# Altium PCB remote.PcbDoc (part 2 of 4)
Units mil, origin at the board's own origin, x right, y up, seen from the top; angles counter-clockwise.
Board outline 1653.54 x 3582.68 mil, 2 copper layers (Top Layer, Bottom Layer); 71 components, 53 nets, 248 pads, 250 vias.
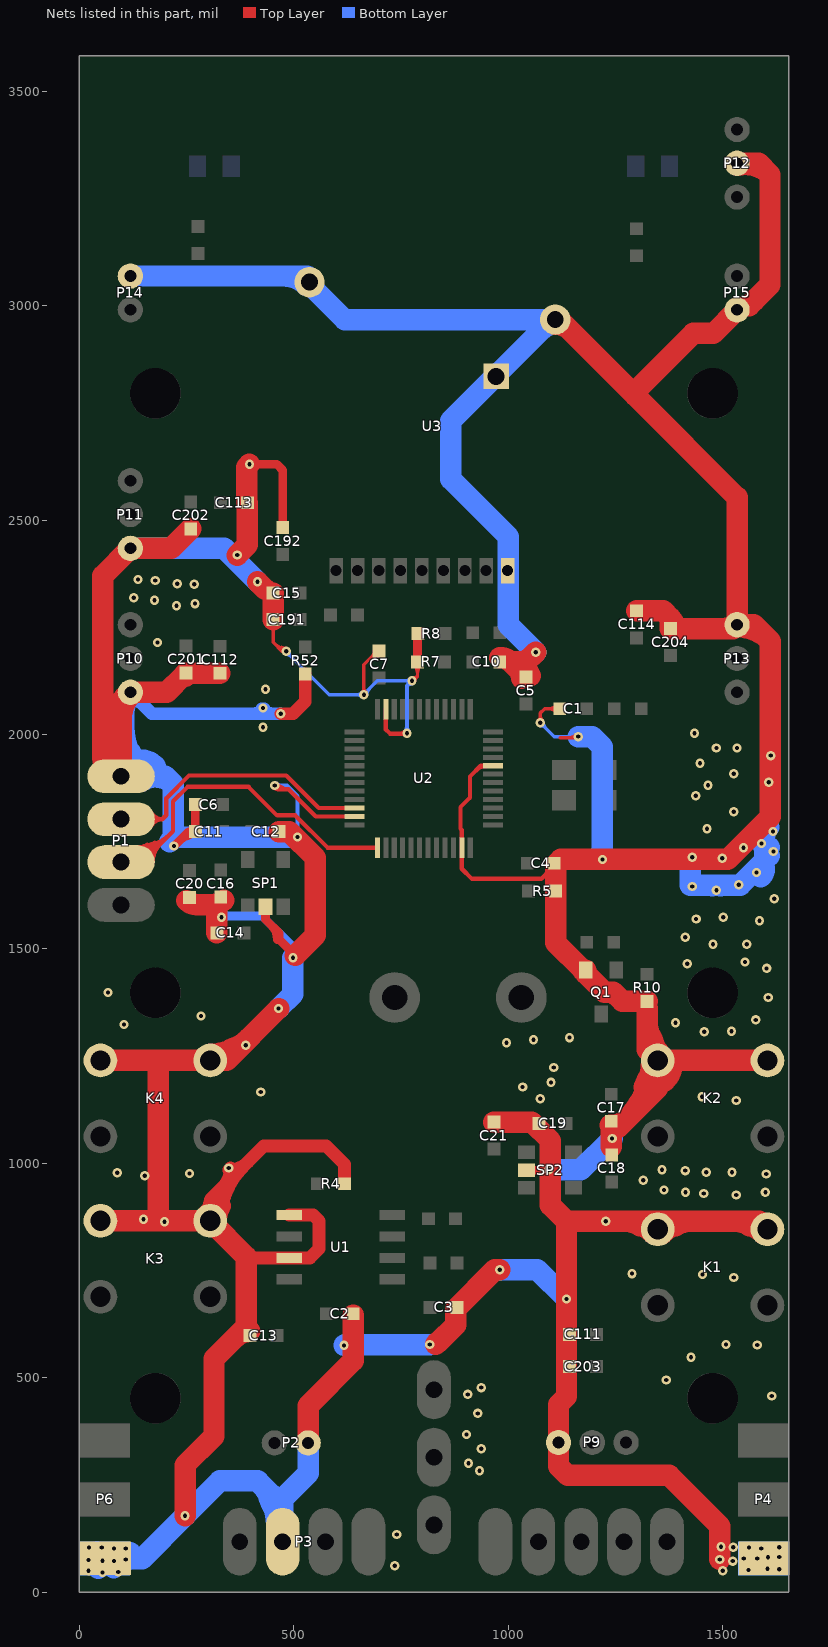
[diagram p2: the nets of this part, all layers, seen from the top]

## Via types
v1: diameter 21.65, hole 9.84, Top Layer to Bottom Layer, tented both sides, 241 vias
v2: diameter 21.65, hole 9.84, Top Layer to Bottom Layer, 9 vias

## Nets (pads, with @x,y where several pads share a name; then routed paths per layer and width w, separated by ;. In a path a pad name is that pad's centre, name@x,y a point inside that pad or via, vN(x,y) a via of type N, cw(c..) or ccw(c..) an arc to the next point about the centre after c; other vN are vias at no path point) (continued)
GND: C1.2 C2.2 C3.2 C4.1 C5.1 C6.1 C7.1 C10.2 C11.1 C12.2 C13.2 C14.2 C15.1 C16.2 C17.1 C18.2 C19.2 C20.2 C21.2 C111.1 C112.1 C113.1 C114.1 C191.2 C192.2 C201.2 C202.2 C203.2 C204.2 K1.2 K2.2 K3.2 K4.2 P1.1 P2.2 P3.2 P4.1 P6.1 P9.1 P10.1 P11.1 P12.2 P13.1 P14.2 P15.2 Q1.2 R4.1 R5.2 R7.1 R8.1 R10.2 R52.1 SP1.2 SP2.2 U1.1 U1.3 U2.8 U2.23 U2.35 U2.47 U3.8 U3.9 U3.10 | length 32683
  Top Layer w8: C191.2@451.77,2267.72 451.77,2214.57 472.44,2193.9 v1(482.28,2193.9) ; 471.35,2203.65 cw(c466.26,2184.64) v1@483.3,2194.48 ; v1(663.42,2092.62) 663.42,2162.43 695.87,2194.88 C7.1@698.82,2194.88 ; v1(775.63,2125.1) 777.66,2125.1 788.39,2135.83 ; R7.1@788.39,2169.29 788.39,2135.83 ; v1(1074.8,2027.56) 1074.8,2050.2 1084.64,2060.04 C1.2@1120.08,2060.04 ; 1121.06,1992.13 1160.43,1992.13 v1(1163.39,1995.08) ; 451.77,2241.16 cw(c478.33,2241.16) 459.55,2259.94 ccw(c478.33,2241.16) 451.77,2241.16 ; 451.77,2241.16 ccw(c425.22,2241.16) 443.99,2259.94 cw(c425.22,2241.16) 451.77,2241.16 ; 663.42,2109.1 cw(c646.94,2109.1) 658.59,2097.45 ccw(c646.94,2109.1) 663.42,2109.1 ; 663.42,2109.1 ccw(c679.9,2109.1) 668.25,2097.45 cw(c679.9,2109.1) 663.42,2109.1 ; 788.39,2135.83 cw(c778.5,2145.71) 776.57,2131.87 ccw(c778.5,2145.71) 788.39,2135.83 ; 788.39,2142.74 cw(c814.94,2142.74) 796.16,2161.51 ccw(c814.94,2142.74) 788.39,2142.74 ; 788.39,2142.73 ccw(c761.83,2142.73) 780.61,2161.51 cw(c761.83,2142.73) 788.39,2142.73 ; 1074.8,2044.04 cw(c1058.32,2044.04) 1069.98,2032.39 ccw(c1058.32,2044.04) 1074.8,2044.04 ; 1074.8,2044.04 ccw(c1091.28,2044.04) 1079.63,2032.39 cw(c1091.28,2044.04) 1074.8,2044.04 ; 1093.52,2060.04 cw(c1093.52,2033.49) 1112.3,2052.26 ccw(c1093.52,2033.49) 1093.52,2060.04 ; 1093.52,2060.04 ccw(c1093.52,2086.6) 1112.3,2067.82 cw(c1093.52,2086.6) 1093.52,2060.04 ; 453.83,2212.51 ccw(c482.28,2240.97) 482.28,2200.72 cw(c482.28,2240.97) 453.83,2212.51 ; 467.48,2198.85 ccw(c482.28,2213.65) 482.28,2192.72 cw(c482.28,2213.65) 467.48,2198.85 ; 675,2174.02 cw(c698.82,2150.2) 698.82,2183.88 ccw(c698.82,2150.2) 675,2174.02 ; 682.13,2181.14 ccw(c668.39,2194.88) 687.82,2194.88 cw(c668.39,2194.88) 682.13,2181.14 ; v1@782.46,2125.1 cw(c794.02,2125.1) 785.84,2133.28 ccw(c794.02,2125.1) v1@782.46,2125.1 ; 1139.78,1992.13 ccw(c1139.78,2018.69) 1158.56,1999.91 cw(c1139.78,2018.69) 1139.78,1992.13
  Top Layer w10: v1@458.6,1875.85 cw(c466,1862.92) 474.25,1875.32 ; 462.6,1872.05 488.19,1872.05 ; U2.35@641.73,1809.06 551.18,1809.06 488.19,1872.05 ; U2.23@714.57,2059.05 714.57,2011.81 724.41,2001.97 762.8,2001.97 v1(763.78,2002.95) ; U2.8@964.57,1927.17 936.02,1927.17 910.93,1902.07 910.93,1852.85 888.78,1830.71 888.78,1780.51 891.73,1777.56 891.73,1687.01 915.35,1663.39 1076.77,1663.39 C4.1@1110.24,1696.85 ; 1092.97,1683.7 cw(c1116.17,1677.49) C4.1@1107.28,1699.8 ; 488.19,1872.05 cw(c488.19,1909.48) 460.08,1884.75 ccw(c488.19,1909.48) 488.19,1872.05 ; v1@452.58,1878.15 ccw(c466.07,1890.02) 466.07,1872.05 cw(c466.07,1890.02) v1@452.58,1878.15 ; 747.34,2001.97 ccw(c747.34,2019.4) 759.66,2007.07 cw(c747.34,2019.4) 747.34,2001.97 ; 752.09,2001.97 cw(c752.09,1991.26) 759.66,1998.83 ccw(c752.09,1991.26) 752.09,2001.97 ; 926.82,1917.96 cw(c946.85,1897.94) 946.85,1926.26 ccw(c946.85,1897.94) 926.82,1917.96 ; 1086.04,1672.66 ccw(c1058.89,1699.8) 1097.28,1699.8 cw(c1058.89,1699.8) 1086.04,1672.66
  Top Layer w20: v1@220.96,1739.67 254.92,1773.62 C11.1@270.67,1773.62 C6.1@270.67,1836.61 ; 249,1762.81 ccw(c241.61,1790.4) C11.1@266.34,1776.12 ; v1(396.65,2629.92) 460.63,2629.92 474.41,2616.14 C192.2@474.41,2482.28 ; SP1.2@434.06,1598.43 434.06,1568.9 466.53,1536.42 466.53,1521.65 v1@498.03,1490.16 ; 447.56,1555.39 cw(c413.82,1521.65) 461.53,1521.65 ; R7.1@788.39,2169.29 788.39,2234.25 R8.1@789.37,2235.24 ; SP2.2@1042.32,984.25 v1@1093.5,984.25 ; 1240.16,1039.37 1240.16,1020.67 C18.2@1241.14,1019.68 ; 235.25,1753.95 cw(c270.67,1718.53) 270.67,1768.62 ccw(c270.67,1718.53) 235.25,1753.95 ; 488.97,1499.22 cw(c469.07,1479.33) 497.2,1479.33 ccw(c469.07,1479.33) 488.97,1499.22
  Top Layer w30: K3.2@293.66,887.65 ccw(c277.08,918.78) 311.15,909.65 ccw(c332.78,903.85) K3.2@319.53,885.79 ; K3.2@305.12,866.14 305.12,915.35 ; K3.2@307.93,861.27 ccw(c274.54,919.1) 339.05,901.81 ; 388.78,779.92 537.79,779.92 559.06,801.18 559.06,866.14 545.28,879.92 U1.1@489.17,879.92 ; v1(469.49,2048.23) 498.03,2048.23 526.57,2076.77 R52.1@526.57,2140.75 ; R4.1@618.11,952.76 618.11,998.03 575.79,1040.35 430.12,1040.35 305.12,915.35 ; 305.12,915.35 cw(c267.62,915.35) 290.35,885.53 ccw(c267.62,915.35) 305.12,915.35 ; 305.12,915.35 ccw(c342.62,915.35) 319.89,885.52 cw(c342.62,915.35) 305.12,915.35 ; K3.2@299.49,866.14 cw(c404.71,866.14) 330.31,940.54 ccw(c404.71,866.14) K3.2@299.49,866.14 ; K3.2@329.49,866.14 cw(c507.13,866.14) 381.52,991.76 ccw(c507.13,866.14) K3.2@329.49,866.14 ; 333.97,944.21 ccw(c289.01,989.17) 352.6,989.17 cw(c289.01,989.17) 333.97,944.21 ; v1@348.43,985 ccw(c348.43,1048.59) 393.39,1003.62 cw(c348.43,1048.59) v1@348.43,985
  Top Layer w50: K3.2@49.21,866.14 K3.2@305.12,866.14 388.78,782.48 388.78,779.92 388.78,619.09 313.98,544.29 313.98,364.17 246.56,296.75 v1(246.56,178.64) ; K4.2@49.21,1240.16 184.06,1240.16 ; 184.06,867.13 184.06,1240.16 ; C201.2@247.54,2135.33 249.02,2136.81 C201.2@249.02,2143.7 244.09,2138.78 203.74,2098.43 P10.1@119.09,2098.43 97.44,2076.78 P1.1@97.44,1902.56 55.12,1944.88 55.12,2370.08 P11.1@119.09,2434.06 214.57,2434.06 C202.2@259.84,2479.33 ; C201.2@250,2142.72 C112.1@327.76,2142.72 ; 276.57,1603.35 320.87,1603.35 C14.2@320.87,1537.4 ; K4.2@317.56,1232.97 cw(c388.65,1191.93) 367.4,1271.22 ; v1(368.11,2418.31) 391.73,2441.93 C113.1@391.73,2540.35 390.26,2541.83 390.26,2623.53 v1(396.65,2629.92) ; v1(415.35,2356.3) 433.07,2338.58 ; C191.2@451.77,2267.72 C15.1@451.77,2329.72 ; v1(464.57,1361.22) 343.5,1240.16 184.06,1240.16 ; C12.2@465.55,1773.62 489.71,1773.62 550.2,1713.13 550.2,1531.5 v1@503.44,1484.74 ; P2.2@533.46,348.43 533.46,435.04 638.78,540.35 C2.2@638.78,646.65 ; 830.71,578.74 833.74,581.78 835.73,581.78 877.32,623.37 877.32,660.78 968.5,751.97 v1(980.32,751.97) ; C21.2@966.54,1096.46 1055.12,1096.46 1098.32,1053.25 1098.32,902.66 1135.83,865.16 ; C5.1@1041.34,2133.86 1005.91,2169.29 ; v1(1063.98,2191.93) 1041.34,2169.29 ; U3.10@1111.14,2975 1291.1,2795.04 1431.1,2935.04 1478.35,2935.04 P15.2@1533.46,2990.16 ; 1240.16,1039.37 1240.16,1085.63 1252.95,1085.63 1255.41,1083.17 1348.43,1176.18 K2.2@1348.43,1240.16 K2.2@1604.33,1240.16 ; 1296.02,2790.12 1533.46,2552.68 P13.1@1533.46,2255.91 ; C114.1@1299.21,2288.39 1361.22,2288.39 1377.95,2271.65 ; 1301.03,857.79 ccw(c1320.22,891.03) K1.2@1340.74,858.6 ; 1317.37,1177.87 cw(c1396.65,1156.63) K2.2@1355.61,1227.71 ; K2.2@1323.82,1264.76 1323.82,1362.2 ; R10.2@1323.82,1377.95 1266.28,1377.95 1245.13,1399.11 1224.37,1399.11 1181.1,1442.38 Q1.2@1181.1,1450.79 1174.19,1450.79 1110.24,1514.74 1110.24,1696.85 1122.05,1708.66 v1(1219.49,1708.66) 1511.81,1708.66 1611.22,1808.07 1611.22,2217.52 1572.83,2255.91 P13.1@1533.46,2255.91 ; 1331.87,1296.59 cw(c1282.03,1267.81) K2.2@1335.16,1245.68 ; K1.2@1356.11,858.6 ccw(c1376.63,891.03) 1395.82,857.79 ; v1(1493.11,76.77) 1493.11,154.53 1375,272.64 1138.78,272.64 1117.13,294.29 1117.13,437.99 1135.83,456.69 v1(1135.83,684.05) 1135.83,865.16 ; P12.2@1533.46,3331.69 1583.66,3331.69 1610.24,3305.12 ; 1556.94,857.79 ccw(c1576.12,891.03) K1.2@1596.65,858.6 ; 1562.01,3000 1610.24,3048.23 1610.24,3305.12 ; P4.1@1566.93,89.57 P4.1@1582.68,89.57 ; K1.2@1604.33,846.46 1585.63,865.16 1135.83,865.16 ; 55.12,1944.38 ccw(c99.89,1944.38) P1.1@68.23,1912.72 ; 55.12,1944.38 ccw(c99.89,1944.38) P1.1@68.23,1912.72 ; 55.12,1944.38 ccw(c99.89,1944.38) P1.1@68.23,1912.72 ; 55.12,1944.38 ccw(c99.89,1944.38) P1.1@68.23,1912.72 ; C20.2@249.82,1613.01 ccw(c273.14,1636.33) 273.14,1603.35 ; C20.2@249.82,1613.01 ccw(c273.14,1636.33) 273.14,1603.35 ; C20.2@249.82,1613.01 ccw(c273.14,1636.33) 273.14,1603.35 ; C20.2@249.82,1613.01 ccw(c273.14,1636.33) 273.14,1603.35 ; 1005.91,2169.29 ccw(c981.67,2145.06) 979.76,2179.28 cw(c981.67,2145.06) 1005.91,2169.29 ; 1005.91,2169.29 cw(c1005.91,2121.89) 1050.81,2137.06 ccw(c1005.91,2121.89) 1005.91,2169.29 ; 1005.91,2169.29 1041.34,2169.29 ; 1041.34,2169.29 ccw(c1068.47,2142.16) 1031.78,2130.93 cw(c1068.47,2142.16) 1041.34,2169.29 ; 1377.95,2271.65 cw(c1353.8,2247.5) 1387.95,2246.86 ccw(c1353.8,2247.5) 1377.95,2271.65 ; 1377.95,2271.65 C204.2@1377.95,2247.05 1524.61,2247.05 P13.1@1533.46,2255.91 ; 1610.23,3305.12 ccw(c1552.11,3247) 1534.44,3327.27 cw(c1552.11,3247) 1610.23,3305.12 ; 97.44,2035.23 cw(c182.29,2035.23) 122.29,2095.22 ccw(c182.29,2035.23) 97.44,2035.23 ; 97.44,2067.81 cw(c123.91,2067.81) 119.79,2093.95 ccw(c123.91,2067.81) 97.44,2067.81 ; K4.2@305.12,1254.53 ccw(c305.12,1381.89) 395.18,1291.83 cw(c305.12,1381.89) K4.2@305.12,1254.53 ; 311.09,1603.35 ccw(c311.09,1639.69) 336.8,1613.99 cw(c311.09,1639.69) 311.09,1603.35 ; 364.3,594.62 cw(c397.64,561.28) 397.64,608.43 ccw(c397.64,561.28) 364.3,594.62 ; C10.2@980.31,2179.29 cw(c980.31,2141.65) 1006.93,2168.27 ccw(c980.31,2141.65) C10.2@980.31,2179.29 ; C5.1@1031.34,2133.86 cw(c1092.74,2133.86) 1049.32,2177.28 ccw(c1092.74,2133.86) C5.1@1031.34,2133.86 ; U3.10@1109.57,2956.89 cw(c1109.57,2909.36) 1143.17,2942.97 ccw(c1109.57,2909.36) U3.10@1109.57,2956.89 ; C17.1@1238.18,1088.62 ccw(c1245.29,1123.81) 1270.67,1098.43 cw(c1245.29,1123.81) C17.1@1238.18,1088.62 ; C17.1@1240.16,1088.43 ccw(c1240.16,1137.95) 1275.17,1102.93 cw(c1240.16,1137.95) C17.1@1240.16,1088.43 ; 1268.58,865.16 cw(c1268.58,766.62) 1338.26,836.3 ccw(c1268.58,766.62) 1268.58,865.16 ; 1278.66,1106.41 ccw(c1144.91,1240.16) 1334.06,1240.16 cw(c1144.91,1240.16) 1278.66,1106.41 ; 1323.82,1334.25 ccw(c1442.52,1334.25) 1358.59,1250.32 cw(c1442.52,1334.25) 1323.82,1334.25 ; K1.2@1358.59,836.3 cw(c1428.27,766.62) 1428.27,865.16 ccw(c1428.27,766.62) K1.2@1358.59,836.3 ; 1364.01,1191.77 ccw(c1315.62,1240.16) 1384.06,1240.16 cw(c1315.62,1240.16) 1364.01,1191.77 ; 1377.62,2271.98 cw(c1352.69,2247.05) 1387.95,2247.05 ccw(c1352.69,2247.05) 1377.62,2271.98 ; 1501.15,2247.05 ccw(c1501.15,2288.22) 1530.26,2259.11 cw(c1501.15,2288.22) 1501.15,2247.05 ; 1524.49,865.16 cw(c1524.49,766.62) 1594.17,836.3 ccw(c1524.49,766.62) 1524.49,865.16 ; P13.1@1533.46,2251.38 cw(c1533.46,2145.4) 1608.4,2220.34 ccw(c1533.46,2145.4) P13.1@1533.46,2251.38 ; P15.2@1533.46,2994.69 ccw(c1533.46,3050.76) 1573.12,3011.11 cw(c1533.46,3050.76) P15.2@1533.46,2994.69
  Bottom Layer w8: P6.1@17.69,70.23 cw(c13.44,64.28) P6.1@20.5,62.38 ; P6.1@18.24,69.88 cw(c14.02,62.57) P6.1@22.17,64.75 ; P6.1@21.14,64.76 cw(c29.28,62.57) P6.1@25.07,69.88 ; P6.1@22.81,62.38 cw(c29.87,64.28) P6.1@25.62,70.23 ; P6.1@39.19,47.28 ccw(c42.5,53.01) P6.1@48.23,49.69 ; P6.1@56.8,99.32 cw(c64.85,90.64) P6.1@67.91,102.07 ; P6.1@58.08,107.74 ccw(c66.76,112.75) P6.1@64.16,103.07 ; P6.1@59.06,78.74 48.23,78.74 v1(22.64,104.33) v1(52.17,104.33) 78.74,104.33 v1(80.71,102.36) v1(108.27,102.36) v1(108.27,76.77) 104.33,72.83 v1(80.71,72.83) 55.12,72.83 v1(54.13,73.82) 23.62,73.82 v1(21.65,75.79) v1(21.65,50.2) 50.19,50.2 v1(54.13,46.26) 89.57,46.26 v1(90.55,47.24) ; P6.1@66.41,74.6 ccw(c68.77,83.4) P6.1@75.6,77.36 ; P6.1@68.93,73.92 cw(c66.43,64.59) P6.1@74.8,69.42 ; P6.1@84.41,78.57 ccw(c92.64,91.31) P6.1@96.56,76.66 ; P6.1@86.62,69.42 cw(c99.69,61.88) P6.1@95.78,76.45 ; P6.1@93.32,75.76 cw(c96.63,70.02) P6.1@102.36,73.35 ; P6.1@104.3,96.81 cw(c100.05,90.85) P6.1@107.12,88.96 ; P6.1@104.85,96.45 cw(c100.64,89.15) P6.1@108.78,91.33 ; P6.1@107.75,91.33 cw(c115.9,89.15) P6.1@111.68,96.45 ; P6.1@109.42,88.96 cw(c116.49,90.85) P6.1@112.23,96.81 ; v1(482.28,2193.9) 481.3,2193.9 582.58,2092.62 v1(663.42,2092.62) 663.42,2093.54 694.99,2125.1 v1(775.63,2125.1) ; v1(1074.8,2027.56) 1107.28,1995.08 v1(1163.39,1995.08) ; P4.1@1547.76,85.41 ccw(c1544.7,99.5) 1557.19,92.29 ccw(c1570.15,84.8) P4.1@1555.77,80.64 ; P4.1@1554.76,88.08 ccw(c1548.22,94.62) P4.1@1555.58,100.21 ; P4.1@1555.38,91.02 cw(c1574.49,92.4) P4.1@1560.15,105.11 ; P4.1@1558.27,58.76 ccw(c1552.44,80.52) P4.1@1571.95,69.26 ; v1(1560.04,52.17) 1580.71,72.83 v1(1580.71,78.74) v1(1549.21,78.74) ; P4.1@1566.63,53.93 cw(c1576.71,56.63) P4.1@1567.68,61.85 ; P4.1@1568.54,65.84 ccw(c1555.65,78.74) P4.1@1573.88,78.74 ; P4.1@1570.3,67.6 cw(c1580.71,57.19) P4.1@1580.71,71.91 ; P4.1@1571.3,69.09 cw(c1587.36,64.79) P4.1@1580.2,79.8 ; P4.1@1579.69,79.33 cw(c1596.74,69.49) P4.1@1591.64,88.5 ; P4.1@1585.63,83.47 ccw(c1591.81,89.42) 1594.03,81.14 ccw(c1597.13,69.55) P4.1@1586.67,75.41 ; P4.1@1586.34,82.61 ccw(c1590.79,85.66) 1592.18,80.45 ccw(c1594.25,72.73) P4.1@1586.95,75.97 ; P4.1@1587.8,95.77 cw(c1584.49,83.42) P4.1@1595.56,89.81 ; P4.1@1590.01,103.45 cw(c1584.71,90.58) P4.1@1598.15,94.18 ; P4.1@1590.95,96.64 cw(c1583.35,83.46) P4.1@1598.51,82.24 ; P4.1@1591.43,80.25 cw(c1594.39,75.12) P4.1@1599.47,78.17 ; P4.1@1592.81,93.7 ccw(c1605.32,106.21) P4.1@1605.32,88.52 ; P4.1@1594.01,92.49 cw(c1583.21,81.69) P4.1@1598.49,81.69 ; P4.1@1594.49,78.74 P4.1@1621.06,105.31 ; P4.1@1595.48,98.95 ccw(c1601.14,95.69) P4.1@1596.52,91.07 ; P4.1@1596.03,90.86 ccw(c1611.07,94.89) P4.1@1604.85,80.62 ; P4.1@1596.08,100.33 ccw(c1613.01,95.05) P4.1@1597.65,86.19 ; P4.1@1596.36,101.69 ccw(c1611.07,100.22) P4.1@1603.68,87.42 ; P4.1@1597.23,97.61 cw(c1582.1,88.88) P4.1@1598.79,83.71 ; P4.1@1597.48,89.34 ccw(c1610.42,92.81) P4.1@1604.83,80.63 ; P4.1@1599.07,94.44 ccw(c1610.5,101.03) P4.1@1607.08,88.29 ; P4.1@1600.11,93.4 cw(c1609.07,102.36) P4.1@1596.39,102.36 ; P4.1@1600.24,77.13 cw(c1591.41,69.21) P4.1@1602.87,66.14 ; P4.1@1603.69,69.22 cw(c1614.13,66.42) P4.1@1608.73,75.78 ; P4.1@1603.9,89.61 ccw(c1589.58,75.29) P4.1@1589.57,95.54 ; P4.1@1604.18,81.39 cw(c1617.11,84.81) P4.1@1609.6,95.87 ; P4.1@1604.94,69.32 cw(c1609.9,70.65) P4.1@1607.93,75.39 ; P4.1@1605.95,80.71 ccw(c1595.23,97.21) P4.1@1614.49,93.12 ; P4.1@1611.92,83.44 cw(c1628.69,87.86) P4.1@1618.94,102.21 ; P4.1@1617.07,55.77 ccw(c1619.6,65.22) P4.1@1626.89,58.69 ; P4.1@1617.53,92.51 cw(c1631.97,78.08) P4.1@1631.97,98.49 ; P4.1@1620.77,54.78 cw(c1618.51,46.37) P4.1@1626.06,50.72 ; P4.1@1621.04,95.56 ccw(c1615.94,114.57) P4.1@1632.99,104.73 ; P4.1@1621.47,96.45 ccw(c1612.6,105.32) P4.1@1625.14,105.32 ; P4.1@1628.19,99.63 cw(c1625.13,95.02) 1630.48,93.59 cw(c1639.08,91.28) P4.1@1635.06,99.23 ; P4.1@1628.88,99.23 cw(c1624.86,91.28) 1633.46,93.59 cw(c1638.81,95.02) P4.1@1635.75,99.63 ; P6.1@17.69,55.75 ccw(c13.43,61.71) P6.1@20.5,63.6 ; P6.1@17.69,55.75 ccw(c13.43,61.71) P6.1@20.5,63.6 ; P6.1@17.69,55.75 ccw(c13.43,61.71) P6.1@20.5,63.6 ; P6.1@18.24,56.11 ccw(c14.03,63.41) P6.1@22.17,61.23 ; P6.1@18.24,56.11 ccw(c14.03,63.41) P6.1@22.17,61.23 ; P6.1@18.24,56.11 ccw(c14.03,63.41) P6.1@22.17,61.23 ; P6.1@21.14,61.23 ccw(c29.29,63.42) P6.1@25.07,56.11 ; P6.1@21.14,61.23 ccw(c29.29,63.42) P6.1@25.07,56.11 ; P6.1@21.14,61.23 ccw(c29.29,63.42) P6.1@25.07,56.11 ; P6.1@21.65,59.31 cw(c38.13,59.31) P6.1@26.48,70.96 ; P6.1@21.65,59.31 ccw(c5.17,59.31) 16.83,70.96 cw(c5.17,59.31) P6.1@21.65,59.31 ; P6.1@21.65,59.31 cw(c38.13,59.31) P6.1@26.48,70.96 ; P6.1@21.65,66.68 cw(c5.18,66.68) 16.83,55.03 ccw(c5.18,66.68) P6.1@21.65,66.68 ; P6.1@21.65,66.68 ccw(c38.14,66.68) P6.1@26.48,55.03 ; P6.1@21.65,66.68 ccw(c38.14,66.68) P6.1@26.48,55.03 ; P6.1@22.8,63.6 ccw(c29.87,61.71) P6.1@25.62,55.76 ; P6.1@22.8,63.6 ccw(c29.87,61.71) P6.1@25.62,55.76 ; P6.1@22.8,63.6 ccw(c29.87,61.71) P6.1@25.62,55.76 ; P6.1@25.43,44.51 cw(c35.56,29.25) P6.1@40.3,46.94 ; P6.1@25.43,44.51 cw(c35.56,29.25) P6.1@40.3,46.94 ; P6.1@25.43,44.51 cw(c35.56,29.25) P6.1@40.3,46.94 ; P6.1@26.48,55.03 ccw(c38.14,66.68) P6.1@38.14,50.2 ; P6.1@26.48,55.03 ccw(c38.14,66.68) P6.1@38.14,50.2 ; P6.1@26.48,70.96 cw(c33.38,64.06) 33.38,73.82 ccw(c33.38,64.06) P6.1@26.48,70.96 ; P6.1@27.57,53.61 ccw(c36.88,58.99) P6.1@34.09,48.6 ; P6.1@27.57,53.61 ccw(c36.88,58.99) P6.1@34.09,48.6 ; P6.1@27.57,53.61 ccw(c36.88,58.99) P6.1@34.09,48.6 ; P6.1@34.29,92.68 cw(c45.95,104.33) 29.46,104.33 ccw(c45.95,104.33) P6.1@34.29,92.68 ; P6.1@34.29,92.68 ccw(c22.64,81.02) 22.64,97.5 cw(c22.64,81.02) P6.1@34.29,92.68 ; P6.1@35.68,104.33 cw(c35.68,87.85) 47.34,99.5 ccw(c35.68,87.85) P6.1@35.68,104.33 ; P6.1@35.68,104.33 ccw(c35.68,120.81) 47.34,109.16 cw(c35.68,120.81) P6.1@35.68,104.33 ; P6.1@37.65,73.82 cw(c37.65,57.34) 49.31,68.99 ccw(c37.65,57.34) P6.1@37.65,73.82 ; P6.1@37.65,73.82 ccw(c37.65,90.3) 49.31,78.65 cw(c37.65,90.3) P6.1@37.65,73.82 ; P6.1@38.14,50.2 ccw(c38.14,33.72) 26.48,45.37 cw(c38.14,33.72) P6.1@38.14,50.2 ; P6.1@39.12,104.33 cw(c39.12,120.81) 27.47,109.16 ccw(c39.12,120.81) P6.1@39.12,104.33 ; P6.1@39.12,104.33 ccw(c39.12,87.85) 27.47,99.5 cw(c39.12,87.85) P6.1@39.12,104.33 ; P6.1@58.7,68.74 cw(c66.62,59.92) P6.1@69.69,71.37 ; P6.1@58.7,68.74 cw(c66.62,59.92) P6.1@69.69,71.37 ; P6.1@58.7,68.74 cw(c66.62,59.92) P6.1@69.69,71.37 ; P6.1@60.05,77.23 ccw(c69.41,82.64) P6.1@66.61,72.2 ; P6.1@60.05,77.23 ccw(c69.41,82.64) P6.1@66.61,72.2 ; P6.1@60.05,77.23 ccw(c69.41,82.64) P6.1@66.61,72.2 ; P6.1@60.44,76.43 ccw(c65.18,78.4) P6.1@66.51,73.45 ; P6.1@60.44,76.43 ccw(c65.18,78.4) P6.1@66.51,73.45 ; P6.1@60.44,76.43 ccw(c65.18,78.4) P6.1@66.51,73.45 ; P6.1@64.23,72.83 cw(c64.23,56.35) 75.88,68.01 ccw(c64.23,56.35) P6.1@64.23,72.83 ; P6.1@64.23,72.83 ccw(c64.23,89.32) 75.88,77.66 cw(c64.23,89.32) P6.1@64.23,72.83 ; P6.1@68.65,104.33 cw(c68.65,120.81) 56.99,109.16 ccw(c68.65,120.81) P6.1@68.65,104.33 ; P6.1@68.65,104.33 ccw(c68.65,87.85) 56.99,99.5 cw(c68.65,87.85) P6.1@68.65,104.33 ; P6.1@70.62,46.26 cw(c70.62,62.74) 58.96,51.09 ccw(c70.62,62.74) P6.1@70.62,46.26 ; P6.1@70.62,46.26 ccw(c70.62,29.78) 58.96,41.43 cw(c70.62,29.78) P6.1@70.62,46.26 ; P6.1@91.79,102.36 cw(c91.79,85.88) P6.1@103.44,97.53 ; P6.1@91.79,102.36 ccw(c91.79,118.84) 103.44,107.19 cw(c91.79,118.84) P6.1@91.79,102.36 ; P6.1@91.79,102.36 cw(c91.79,85.88) P6.1@103.44,97.53 ; P6.1@97.19,72.83 cw(c97.19,89.32) 85.54,77.66 ccw(c97.19,89.32) P6.1@97.19,72.83 ; P6.1@97.19,72.83 ccw(c97.19,56.35) 85.54,68.01 cw(c97.19,56.35) P6.1@97.19,72.83 ; P6.1@97.19,102.36 cw(c97.19,118.84) 85.54,107.19 ccw(c97.19,118.84) P6.1@97.19,102.36 ; P6.1@97.19,102.36 ccw(c97.19,85.88) 85.54,97.53 cw(c97.19,85.88) P6.1@97.19,102.36 ; P6.1@103.44,81.6 cw(c82.28,102.76) 82.28,72.83 ccw(c82.28,102.76) P6.1@103.44,81.6 ; P6.1@103.44,81.6 ccw(c91.79,93.25) P6.1@108.27,93.25 ; P6.1@103.44,81.6 ccw(c91.79,93.25) P6.1@108.27,93.25 ; P6.1@103.44,97.53 cw(c91.79,85.88) P6.1@108.27,85.88 ; P6.1@103.44,97.53 cw(c91.79,85.88) P6.1@108.27,85.88 ; P6.1@104.3,82.33 ccw(c100.05,88.28) P6.1@107.12,90.18 ; P6.1@104.3,82.33 ccw(c100.05,88.28) P6.1@107.12,90.18 ; P6.1@104.3,82.33 ccw(c100.05,88.28) P6.1@107.12,90.18 ; P6.1@104.85,82.68 ccw(c100.64,89.99) P6.1@108.78,87.8 ; P6.1@104.85,82.68 ccw(c100.64,89.99) P6.1@108.78,87.8 ; P6.1@104.85,82.68 ccw(c100.64,89.99) P6.1@108.78,87.8 ; P6.1@107.75,87.8 ccw(c115.9,89.99) P6.1@111.68,82.68 ; P6.1@107.75,87.8 ccw(c115.9,89.99) P6.1@111.68,82.68 ; P6.1@107.75,87.8 ccw(c115.9,89.99) P6.1@111.68,82.68 ; P6.1@108.27,85.88 cw(c124.75,85.88) 113.09,97.53 ccw(c124.75,85.88) P6.1@108.27,85.88 ; P6.1@108.27,93.25 ccw(c124.75,93.25) 113.09,81.6 cw(c124.75,93.25) P6.1@108.27,93.25 ; P6.1@109.42,90.18 ccw(c116.49,88.28) P6.1@112.23,82.33 ; P6.1@109.42,90.18 ccw(c116.49,88.28) P6.1@112.23,82.33 ; P6.1@109.42,90.18 ccw(c116.49,88.28) P6.1@112.23,82.33 ; 646.94,2092.62 cw(c646.94,2076.14) 658.59,2087.79 ccw(c646.94,2076.14) 646.94,2092.62 ; 646.94,2092.62 ccw(c646.94,2109.1) 658.59,2097.45 cw(c646.94,2109.1) 646.94,2092.62 ; 759.15,2125.1 cw(c759.15,2108.62) 770.8,2120.28 ccw(c759.15,2108.62) 759.15,2125.1 ; 759.15,2125.1 ccw(c759.15,2141.58) 770.8,2129.93 cw(c759.15,2141.58) 759.15,2125.1 ; 1086.46,2015.91 cw(c1098.11,2027.56) 1081.63,2027.56 ccw(c1098.11,2027.56) 1086.46,2015.91 ; 1086.46,2015.91 ccw(c1074.8,2004.25) 1074.8,2020.73 cw(c1074.8,2004.25) 1086.46,2015.91 ; 1146.9,1995.08 cw(c1146.9,1978.6) 1158.56,1990.25 ccw(c1146.9,1978.6) 1146.9,1995.08 ; 1146.9,1995.08 ccw(c1146.9,2011.56) 1158.56,1999.91 cw(c1146.9,2011.56) 1146.9,1995.08 ; P4.1@1547.8,85.42 ccw(c1542.9,108.61) P4.1@1563.43,96.76 ; P4.1@1547.8,85.42 ccw(c1542.9,108.61) P4.1@1563.43,96.76 ; P4.1@1547.8,85.42 ccw(c1542.9,108.61) P4.1@1563.43,96.76 ; v1(1549.21,78.74) ccw(c1533.26,94.69) 1554.57,102.09 cw(c1533.26,94.69) v1(1549.21,78.74) ; v1(1549.21,78.74) P4.1@1561.02,90.55 ; P4.1@1560.87,90.39 cw(c1549.21,102.05) 1549.21,85.57 ccw(c1549.21,102.05) P4.1@1560.87,90.39 ; P4.1@1560.87,90.39 ccw(c1572.52,78.74) 1556.04,78.74 cw(c1572.52,78.74) P4.1@1560.87,90.39 ; P4.1@1561.02,90.55 cw(c1571.52,90.55) 1565.16,98.9 ccw(c1571.52,90.55) P4.1@1561.02,90.55 ; P4.1@1561.02,90.55 ccw(c1550.53,90.55) 1556.89,98.9 cw(c1550.53,90.55) P4.1@1561.02,90.55 ; P4.1@1561.02,90.55 v1(1561.02,104.33) 1562.99,102.36 v1(1589.57,102.36) 1603.84,88.09 1605.32,86.61 v1(1605.32,81.69) 1604.33,80.71 v1(1604.33,55.12) 1605.31,54.14 v1(1631.97,54.14) v1(1631.97,82.68) v1(1631.97,105.32) P4.1@1621.06,105.31 ; P4.1@1564.23,78.74 cw(c1564.23,62.26) 1575.88,73.91 ccw(c1564.23,62.26) P4.1@1564.23,78.74 ; P4.1@1564.23,78.74 ccw(c1564.23,95.22) 1575.88,83.57 cw(c1564.23,95.22) P4.1@1564.23,78.74 ; P4.1@1565.69,78.74 cw(c1565.69,95.22) 1554.04,83.57 ccw(c1565.69,95.22) P4.1@1565.69,78.74 ; P4.1@1565.69,78.74 ccw(c1565.69,62.26) 1554.04,73.91 cw(c1565.69,62.26) P4.1@1565.69,78.74 ; P4.1@1571.69,63.82 cw(c1560.04,75.47) 1560.04,58.99 ccw(c1560.04,75.47) P4.1@1571.69,63.82 ; P4.1@1571.69,63.82 ccw(c1583.35,52.17) 1566.87,52.17 cw(c1583.35,52.17) P4.1@1571.69,63.82 ; P4.1@1573.09,102.36 cw(c1573.09,85.88) 1584.74,97.53 ccw(c1573.09,85.88) P4.1@1573.09,102.36 ; P4.1@1573.09,102.36 ccw(c1573.09,118.84) 1584.74,107.19 cw(c1573.09,118.84) P4.1@1573.09,102.36 ; P4.1@1573.82,104.62 ccw(c1576.89,116.06) P4.1@1584.93,107.37 ; P4.1@1573.82,104.62 ccw(c1576.89,116.06) P4.1@1584.93,107.37 ; P4.1@1573.82,104.62 ccw(c1576.89,116.06) P4.1@1584.93,107.37 ; P4.1@1573.88,78.74 cw(c1543.14,78.74) 1564.88,57.01 ccw(c1543.14,78.74) P4.1@1573.88,78.74 ; P4.1@1577.57,103.62 cw(c1574.98,93.94) P4.1@1583.65,98.95 ; P4.1@1577.57,103.62 cw(c1574.98,93.94) P4.1@1583.65,98.95 ; P4.1@1577.57,103.62 cw(c1574.98,93.94) P4.1@1583.65,98.95 ; P4.1@1588.21,95.67 cw(c1585.41,81.89) P4.1@1597.59,88.92 ; P4.1@1588.21,95.67 cw(c1585.41,81.89) P4.1@1597.59,88.92 ; P4.1@1588.21,95.67 cw(c1585.41,81.89) P4.1@1597.59,88.92 ; P4.1@1589.57,95.54 cw(c1589.57,79.05) P4.1@1601.22,90.71 ; P4.1@1589.57,95.54 cw(c1589.57,79.05) P4.1@1601.22,90.71 ; P4.1@1596.14,100.51 ccw(c1610.6,96.43) P4.1@1597.59,88.92 ; P4.1@1596.14,100.51 ccw(c1610.6,96.43) P4.1@1597.59,88.92 ; P4.1@1596.14,100.51 ccw(c1610.6,96.43) P4.1@1597.59,88.92 ; P4.1@1596.39,102.36 ccw(c1612.87,102.36) P4.1@1601.22,90.71 ; P4.1@1596.39,102.36 ccw(c1612.87,102.36) P4.1@1601.22,90.71 ; P4.1@1598.49,81.69 ccw(c1570.13,81.69) 1590.18,101.75 cw(c1570.13,81.69) P4.1@1598.49,81.69 ; P4.1@1600.92,61.03 ccw(c1596.09,69.4) P4.1@1605.42,66.9 ; P4.1@1600.92,61.03 ccw(c1596.09,69.4) P4.1@1605.42,66.9 ; P4.1@1600.92,61.03 ccw(c1596.09,69.4) P4.1@1605.42,66.9 ; P4.1@1604.33,71.6 cw(c1587.85,71.6) 1599.5,59.95 ccw(c1587.85,71.6) P4.1@1604.33,71.6 ; P4.1@1604.33,71.6 ccw(c1620.81,71.6) P4.1@1609.16,59.95 ; P4.1@1604.33,71.6 ccw(c1620.81,71.6) P4.1@1609.16,59.95 ; P4.1@1606.09,69.41 ccw(c1614.9,67.05) P4.1@1608.86,60.23 ; P4.1@1606.09,69.41 ccw(c1614.9,67.05) P4.1@1608.86,60.23 ; P4.1@1606.09,69.41 ccw(c1614.9,67.05) P4.1@1608.86,60.23 ; P4.1@1609.16,59.95 ccw(c1623.18,73.97) 1623.18,54.14 cw(c1623.18,73.97) P4.1@1609.16,59.95 ; P4.1@1612.1,80.95 cw(c1635.32,78.39) P4.1@1623.64,98.62 ; P4.1@1612.1,80.95 cw(c1635.32,78.39) P4.1@1623.64,98.62 ; P4.1@1612.1,80.95 cw(c1635.32,78.39) P4.1@1623.64,98.62 ; P4.1@1615.49,54.14 cw(c1615.49,37.66) 1627.14,49.31 ccw(c1615.49,37.66) P4.1@1615.49,54.14 ; P4.1@1615.49,54.14 ccw(c1615.49,70.62) P4.1@1627.14,58.96 ; P4.1@1615.49,54.14 ccw(c1615.49,70.62) P4.1@1627.14,58.96 ; P4.1@1621.06,105.31 ccw(c1642.72,83.65) 1612.13,82.05 cw(c1642.72,83.65) P4.1@1621.06,105.31 ; P4.1@1621.06,105.31 cw(c1621.06,100.01) 1625.83,102.33 ccw(c1621.06,100.01) P4.1@1621.06,105.31 ; P4.1@1621.06,105.31 ccw(c1621.06,110.61) 1625.83,108.3 cw(c1621.06,110.61) P4.1@1621.06,105.31 ; P4.1@1627.14,58.96 ccw(c1615.49,70.62) P4.1@1631.97,70.62 ; P4.1@1627.14,58.96 ccw(c1615.49,70.62) P4.1@1631.97,70.62 ; P4.1@1628.19,88.37 ccw(c1625.13,92.98) P4.1@1630.48,94.41 ; P4.1@1628.19,88.37 ccw(c1625.13,92.98) P4.1@1630.48,94.41 ; P4.1@1628.19,88.37 ccw(c1625.13,92.98) P4.1@1630.48,94.41 ; P4.1@1628.88,88.77 ccw(c1624.86,96.72) P4.1@1633.46,94.41 ; P4.1@1628.88,88.77 ccw(c1624.86,96.72) P4.1@1633.46,94.41 ; P4.1@1628.88,88.77 ccw(c1624.86,96.72) P4.1@1633.46,94.41 ; P4.1@1630.48,94.41 ccw(c1639.08,96.72) P4.1@1635.06,88.77 ; P4.1@1630.48,94.41 ccw(c1639.08,96.72) P4.1@1635.06,88.77 ; P4.1@1630.48,94.41 ccw(c1639.08,96.72) P4.1@1635.06,88.77 ; P4.1@1631.97,66.2 cw(c1648.45,66.2) 1636.8,77.85 ccw(c1648.45,66.2) P4.1@1631.97,66.2 ; P4.1@1631.97,66.2 ccw(c1615.49,66.2) 1627.14,77.85 cw(c1615.49,66.2) P4.1@1631.97,66.2 ; P4.1@1631.97,70.62 ccw(c1648.45,70.62) 1636.8,58.96 cw(c1648.45,70.62) P4.1@1631.97,70.62 ; P4.1@1631.97,88.84 cw(c1648.45,88.84) 1636.8,100.49 ccw(c1648.45,88.84) P4.1@1631.97,88.84 ; P4.1@1631.97,88.84 ccw(c1615.49,88.84) 1627.14,100.49 cw(c1615.49,88.84) P4.1@1631.97,88.84 ; P4.1@1631.97,98.49 ccw(c1631.97,55.69) 1601.71,85.96 cw(c1631.97,55.69) P4.1@1631.97,98.49 ; P4.1@1631.97,99.16 cw(c1615.49,99.16) 1627.14,87.51 ccw(c1615.49,99.16) P4.1@1631.97,99.16 ; P4.1@1631.97,99.16 ccw(c1648.45,99.16) 1636.8,87.51 cw(c1648.45,99.16) P4.1@1631.97,99.16 ; P4.1@1633.46,94.41 ccw(c1638.81,92.98) P4.1@1635.75,88.37 ; P4.1@1633.46,94.41 ccw(c1638.81,92.98) P4.1@1635.75,88.37 ; P4.1@1633.46,94.41 ccw(c1638.81,92.98) P4.1@1635.75,88.37 ; P6.1@26.48,80.61 ccw(c42.89,97.02) 42.89,73.82 cw(c42.89,97.02) P6.1@26.48,80.61 ; P6.1@28.14,50.2 cw(c28.14,20.27) 49.31,41.43 ccw(c28.14,20.27) P6.1@28.14,50.2 ; P6.1@40.8,86.17 ccw(c54.13,99.5) 54.13,80.65 cw(c54.13,99.5) P6.1@40.8,86.17 ; P6.1@43.18,83.79 cw(c33.2,73.82) 47.31,73.82 ccw(c33.2,73.82) P6.1@43.18,83.79 ; P6.1@58.96,68.99 cw(c68.24,59.71) 68.24,72.83 ccw(c68.24,59.71) P6.1@58.96,68.99 ; P6.1@58.96,78.65 ccw(c72.99,92.68) 72.99,72.83 cw(c72.99,92.68) P6.1@58.96,78.65 ; P6.1@59.48,104.33 cw(c59.48,81.13) 75.88,97.53 ccw(c59.48,81.13) P6.1@59.48,104.33 ; P6.1@68.98,104.33 ccw(c68.98,114.09) 75.88,107.19 cw(c68.98,114.09) P6.1@68.98,104.33 ; P6.1@71.69,46.26 ccw(c71.69,66.1) 85.72,52.07 cw(c71.69,66.1) P6.1@71.69,46.26 ; P6.1@76.45,46.26 cw(c76.45,33.14) 85.72,42.42 ccw(c76.45,33.14) P6.1@76.45,46.26 ; v1@482.28,2187.07 cw(c482.28,2172.97) 492.26,2182.94 ccw(c482.28,2172.97) v1@482.28,2187.07 ; v1@489.11,2193.9 ccw(c507.97,2193.9) 494.63,2180.56 cw(c507.97,2193.9) v1@489.11,2193.9 ; v1@663.42,2099.45 ccw(c663.42,2113.72) 673.51,2103.63 cw(c663.42,2113.72) v1@663.42,2099.45 ; v1@670.24,2092.62 cw(c688.93,2092.62) 675.72,2105.84 ccw(c688.93,2092.62) v1@670.24,2092.62 ; P4.1@1558.24,87.77 ccw(c1546.66,99.35) 1562.13,104.72 cw(c1546.66,99.35) P4.1@1558.24,87.77 ; P4.1@1565.85,99.5 cw(c1572.75,92.6) 1572.75,102.36 ccw(c1572.75,92.6) P4.1@1565.85,99.5 ; P4.1@1565.85,109.16 ccw(c1582.26,125.56) 1582.26,102.36 cw(c1582.26,125.56) P4.1@1565.85,109.16 ; P4.1@1580.71,77.57 ccw(c1580.71,108) 1602.23,86.48 cw(c1580.71,108) P4.1@1580.71,77.57 ; P4.1@1580.71,85.57 ccw(c1580.71,135.31) 1615.89,100.14 cw(c1580.71,135.31) P4.1@1580.71,85.57 ; P4.1@1600.49,76.87 cw(c1591.21,67.59) 1604.33,67.59 ccw(c1591.21,67.59) P4.1@1600.49,76.87 ; P4.1@1604.14,81.63 cw(c1618.58,82.39) 1608.36,92.61 ccw(c1618.58,82.39) P4.1@1604.14,81.63 ; P4.1@1604.33,62.84 cw(c1624.17,62.84) 1610.14,76.87 ccw(c1624.17,62.84) P4.1@1604.33,62.84 ; P4.1@1609.16,50.29 cw(c1618.44,41.01) 1618.44,54.14 ccw(c1618.44,41.01) P4.1@1609.16,50.29 ; P4.1@1615.36,99.61 cw(c1631.97,83.01) 1631.97,106.49 ccw(c1631.97,83.01) P4.1@1615.36,99.61
  Bottom Layer w10: v1(455.71,1880.91) 484.25,1880.91 508.86,1856.3 v1(508.86,1760.83) ; v1(763.78,2002.95) 763.78,2113.25 v1(775.63,2125.1) ; 469.78,1880.91 cw(c469.78,1894.97) 459.83,1885.03 ccw(c469.78,1894.97) 469.78,1880.91 ; 469.78,1880.91 ccw(c469.78,1866.84) 459.83,1876.79 cw(c469.78,1866.84) 469.78,1880.91 ; 508.86,1774.89 cw(c494.79,1774.89) 504.74,1764.95 ccw(c494.79,1774.89) 508.86,1774.89 ; 508.86,1774.89 ccw(c522.93,1774.89) 512.98,1764.95 cw(c522.93,1774.89) 508.86,1774.89 ; 763.78,2017.02 cw(c749.71,2017.02) 759.66,2007.07 ccw(c749.71,2017.02) 763.78,2017.02 ; 763.78,2017.02 ccw(c777.85,2017.02) 767.9,2007.07 cw(c777.85,2017.02) 763.78,2017.02 ; 765.68,2115.16 cw(c775.63,2105.21) 775.63,2119.28 ccw(c775.63,2105.21) 765.68,2115.16 ; 765.68,2115.16 ccw(c755.73,2125.1) 769.8,2125.1 cw(c755.73,2125.1) 765.68,2115.16
  Bottom Layer w20: P1.1@97.44,1902.56 119.09,1924.21 P10.1@119.09,2098.43 ; P1.1@120.97,1927.29 ccw(c115.1,1936.47) 124.54,1941.92 ccw(c142.38,1952.22) P1.1@140.08,1931.75 ; P1.1@121.48,1927.61 ccw(c105.87,1953.1) 131.76,1968.05 ; P1.1@131.92,1910.55 ccw(c116.59,1935.6) 142.02,1950.28 ; v1@332.68,1576.77 426.18,1576.77 498.03,1504.92 v1(498.03,1479.33) ; 119.09,2051.28 cw(c166.24,2051.28) 132.9,2084.62 ccw(c166.24,2051.28) 119.09,2051.28 ; 119.09,2051.28 ccw(c71.95,2051.28) 105.28,2084.62 cw(c71.95,2051.28) 119.09,2051.28 ; 119.09,1967.96 ccw(c202.21,1967.96) 143.44,1909.18 cw(c202.21,1967.96) 119.09,1967.96 ; 119.09,2016.25 ccw(c250.5,2016.25) 157.58,1923.33 cw(c250.5,2016.25) 119.09,2016.25
  Bottom Layer w30: P10.1@119.09,2098.43 169.29,2048.23 v1(469.49,2048.23) ; P10.1@119.09,2083.9 cw(c119.09,2048.83) 143.89,2073.63 ccw(c119.09,2048.83) P10.1@119.09,2083.9 ; P10.1@133.62,2098.43 ccw(c168.69,2098.43) 143.89,2073.62 cw(c168.69,2098.43) P10.1@133.62,2098.43 ; 404.96,2048.23 ccw(c404.96,2085.2) 431.1,2059.06 cw(c404.96,2085.2) 404.96,2048.23 ; v1@425.2,2059.06 ccw(c451.34,2085.2) 451.34,2048.23 cw(c451.34,2085.2) v1@425.2,2059.06
  Bottom Layer w50: P1.1@97.44,1902.56 200.79,1902.56 219.49,1883.86 ; P11.1@119.09,2434.06 337.6,2434.05 v1(415.35,2356.3) ; P14.2@119.09,3068.9 531.49,3068.9 U3.9@543.31,3057.09 ; 219.49,1756.89 219.49,1883.86 ; 223.43,1760.83 492.13,1760.83 ; 442.96,219.77 ccw(c522.24,241.01) P3.2@481.2,169.93 ; v1(464.57,1361.22) 498.03,1394.69 v1(498.03,1479.33) ; P3.2@474.02,118.11 474.02,202.16 ; U3.9@530.85,3054.79 618.32,2967.32 U3.10@1102.17,2967.32 ; P2.2@533.46,348.43 533.46,277.36 474.02,217.91 474.02,202.16 ; v1(617.13,575.79) 619.09,577.76 v1(816.93,577.76) ; v1(980.32,751.97) 1067.91,751.97 v1(1135.83,684.05) ; v1(1063.98,2191.93) 1000.2,2255.71 1000.2,2461.42 866.14,2595.47 866.14,2731.3 U3.10@1102.17,2967.32 ; v1(1094.49,985.24) 1169.29,985.24 v1(1242.13,1058.07) ; U3.10@1109.57,2967.32 U3.10@1102.17,2967.32 ; v1(1163.39,1995.08) 1195.87,1995.08 1219.49,1971.46 v1(1219.49,1708.66) ; 1424.21,1692.91 1424.21,1648.62 1540.35,1648.62 1597.44,1705.71 1597.44,1746.06 v1(1590.55,1746.06) ; P6.1@59.06,78.74 ccw(c59.06,122.45) 91.1,92.72 cw(c59.06,122.45) P6.1@59.06,78.74 ; P6.1@59.06,78.74 146.65,78.74 v1(246.56,178.64) 327.76,259.84 416.34,259.84 474.02,202.16 ; 219.49,1883.86 ccw(c178.1,1842.47) 144.95,1890.72 cw(c178.1,1842.47) 219.49,1883.86 ; 1588.76,1668.13 ccw(c1567.81,1689.08) 1597.44,1689.08 ; 1588.76,1668.13 ccw(c1567.81,1689.08) 1597.44,1689.08 ; 1588.76,1668.13 ccw(c1567.81,1689.08) 1597.44,1689.08 ; 1588.76,1668.13 ccw(c1567.81,1689.08) 1597.44,1689.08 ; 1597.44,1760.32 cw(c1630.43,1760.32) 1607.1,1783.64 ; 1597.44,1760.32 cw(c1630.43,1760.32) 1607.1,1783.64 ; 1597.44,1760.32 cw(c1630.43,1760.32) 1607.1,1783.64 ; 1597.44,1760.32 cw(c1630.43,1760.32) 1607.1,1783.64 ; P6.1@42.14,94.31 ccw(c79.73,131.89) 79.73,78.74 cw(c79.73,131.89) P6.1@42.14,94.31 ; P6.1@44.11,56.28 cw(c98.33,2.06) 98.33,78.74 ccw(c98.33,2.06) P6.1@44.11,56.28 ; P6.1@70.69,92.34 ccw(c103.52,125.17) 103.52,78.74 cw(c103.52,125.17) P6.1@70.69,92.34 ; P6.1@80.53,57.27 cw(c132.37,5.42) 132.37,78.74 ccw(c132.37,5.42) P6.1@80.53,57.27 ; P6.1@85.46,78.74 ccw(c85.46,125.17) 118.29,92.34 cw(c85.46,125.17) P6.1@85.46,78.74 ; P6.1@98.25,92.34 ccw(c131.08,125.17) 131.08,78.74 cw(c131.08,125.17) P6.1@98.25,92.34 ; P1.1@116.63,1931.93 cw(c143.47,1892.87) 176.97,1926.38 ccw(c143.47,1892.87) P1.1@116.63,1931.93 ; 210.45,1750.18 cw(c236.16,1724.47) 236.16,1760.83 ccw(c236.16,1724.47) 210.45,1750.18 ; 417.89,258.29 cw(c317.07,157.48) 459.65,157.48 ccw(c317.07,157.48) 417.89,258.29 ; 476.68,3068.9 cw(c476.68,2994.51) 529.28,3047.11 ccw(c476.68,2994.51) 476.68,3068.9 ; 1079.12,2944.28 cw(c1109.57,2913.83) 1109.57,2956.89 ccw(c1109.57,2913.83) 1079.12,2944.28 ; 1475.21,1646.83 cw(c1479.53,1642.51) 1479.53,1648.62 ccw(c1479.53,1642.51) 1475.21,1646.83 ; 1490.94,1648.62 cw(c1490.94,1642.51) 1495.26,1646.83 ccw(c1490.94,1642.51) 1490.94,1648.62 ; 1597.44,1711.68 cw(c1633.79,1711.68) 1608.09,1737.38 ccw(c1633.79,1711.68) 1597.44,1711.68 ; v1@1597.44,1743.04 ccw(c1633.79,1743.04) 1608.09,1717.34 cw(c1633.79,1743.04) v1@1597.44,1743.04
  other v1: 1500,50.2 735.24,62.01 1523.62,72.83 1524.61,105.31 1496.06,106.3 740.16,134.84 933.07,283.46 907.48,301.18 937.01,334.65 902.56,368.11 929.13,417.32 1614.17,457.68 905.51,461.61 937.01,477.36 1368.11,495.08 1426.18,548.23 1580.71,576.77 1507.87,577.76 1525.59,734.25 1452.76,741.14 1288.39,743.11 198.82,864.17 1227.36,865.16 149.61,870.08 1531.5,926.18 1455.71,930.12 1413.39,933.07 1599.41,933.07 1363.19,937.99 1314.96,960.63 152.56,971.46 1601.38,975.39 256.89,976.38 88.58,978.35 1461.61,979.33 1521.65,979.33 1412.4,983.27 1358.27,985.24 348.43,989.17 1531.5,1146.65 1074.8,1150.59 1451.77,1155.51 423.23,1166.34 1033.46,1178.15 1099.41,1188.98 1106.3,1223.43 387.8,1275.59 996.06,1281.5 1059.06,1288.39 1142.72,1293.31 1456.69,1307.09 1520.67,1308.07 104.33,1323.82 1389.76,1327.76 1576.77,1334.65 283.46,1343.5 1606.3,1386.81 66.93,1398.62 1602.36,1454.72 1417.32,1465.55 1552.17,1469.49 1477.36,1510.83 1556.1,1510.83 1412.4,1527.56 1585.63,1565.94 1437.99,1569.88 331.69,1573.82 1500.98,1573.82 1620.08,1617.13 1485.24,1636.81 1429.13,1645.67 1537.4,1649.61 1578.74,1678.15 1499.02,1711.61 1429.13,1713.58 1618.11,1727.36 1548.23,1736.22 220.47,1740.16 1617.13,1773.62 1463.58,1780.51 1525.59,1819.88 1437.01,1857.28 1465.55,1881.89 1607.28,1888.78 1525.59,1908.46 1446.85,1933.07 1612.2,1950.79 1485.24,1968.5 1533.46,1968.5 1434.06,2002.95 428.15,2016.73 428.15,2062.01 434.06,2105.31 182.09,2214.57 226.38,2300.2 269.69,2305.12 175.2,2312.99 126.97,2318.9 267.72,2350.39 228.35,2351.38 177.17,2359.25 136.81,2361.22
JTCK: P1.3 U2.37 | length 1550.4
  Top Layer w10: P1.3@97.44,1702.56 146.46,1702.56 218.5,1774.61 218.5,1844.49 251.97,1877.95 394.69,1877.95 461.2,1811.43 503.53,1811.43 578.74,1736.22 U2.37@694.88,1736.22 ; P1.3@121.85,1707.08 cw(c172.37,1691.82) 158.71,1742.8 ; P1.3@131.42,1704.19 cw(c192.61,1685.71) 176.06,1747.45 ; P1.3@140.99,1701.3 cw(c212.84,1679.6) 193.42,1752.1 ; P1.3@141.12,1701.86 cw(c183.55,1694.96) 172.42,1736.47 ; P1.3@136.81,1716.93 ccw(c136.81,1774.91) 177.81,1733.91 cw(c136.81,1774.91) P1.3@136.81,1716.93 ; P1.3@136.81,1726.93 ccw(c136.81,1809.05) 194.88,1750.98 cw(c136.81,1809.05) P1.3@136.81,1726.93 ; P1.3@136.81,1736.93 ccw(c136.81,1843.19) 211.95,1768.05 cw(c136.81,1843.19) P1.3@136.81,1736.93 ; P1.3@161.18,1702.56 cw(c196.73,1702.56) 171.59,1727.69 ccw(c196.73,1702.56) P1.3@161.18,1702.56 ; P1.3@171.18,1702.56 cw(c230.87,1702.56) 188.66,1744.77 ccw(c230.87,1702.56) P1.3@171.18,1702.56
JTMS: P1.2 U2.34 | length 859.5
  Top Layer w10: P1.2@97.44,1802.56 193.31,1802.56 ; U2.34@641.73,1828.74 558.07,1828.74 482.28,1904.53 255.92,1904.53 202.5,1851.12 202.5,1811.76 193.31,1802.56 ; 176.87,1802.56 cw(c176.87,1823.3) 158.45,1813.76 ccw(c176.87,1823.3) 176.87,1802.56 ; 176.87,1802.56 ccw(c176.87,1781.82) 158.45,1791.36 cw(c176.87,1781.82) 176.87,1802.56 ; 193.31,1802.56 cw(c193.31,1831.8) 167.33,1818.36 ccw(c193.31,1831.8) 193.31,1802.56 ; 193.3,1802.56 ccw(c193.3,1773.32) 167.33,1786.76 cw(c193.3,1773.32) 193.3,1802.56